# Altium PCB SiC780驱动.PcbDoc
Units mil, origin at the board's own origin, x right, y up, seen from the top; angles counter-clockwise.
Board outline 3535.17 x 1199.11 mil, 2 copper layers (Top Layer, Bottom Layer); 61 components, 32 nets, 295 pads, 272 vias.
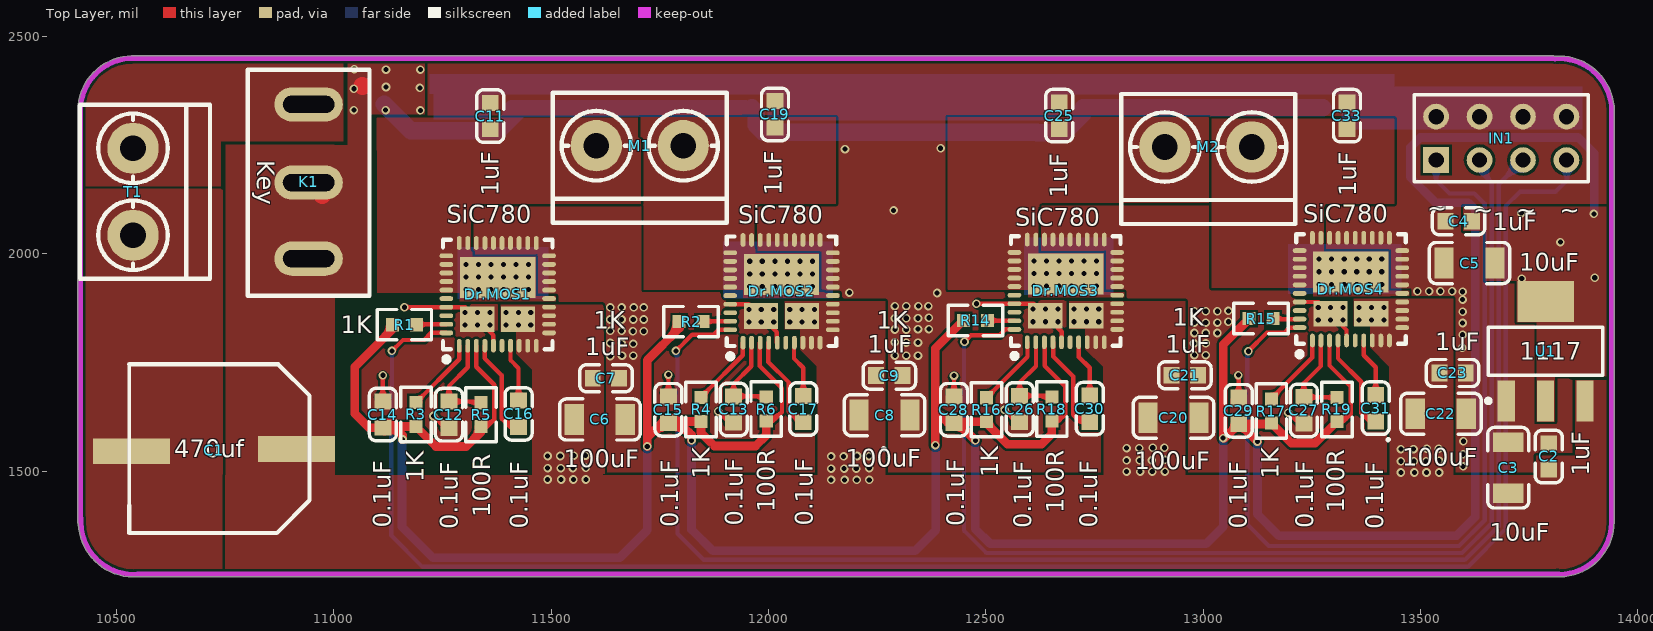
[diagram p0: Top Layer view]
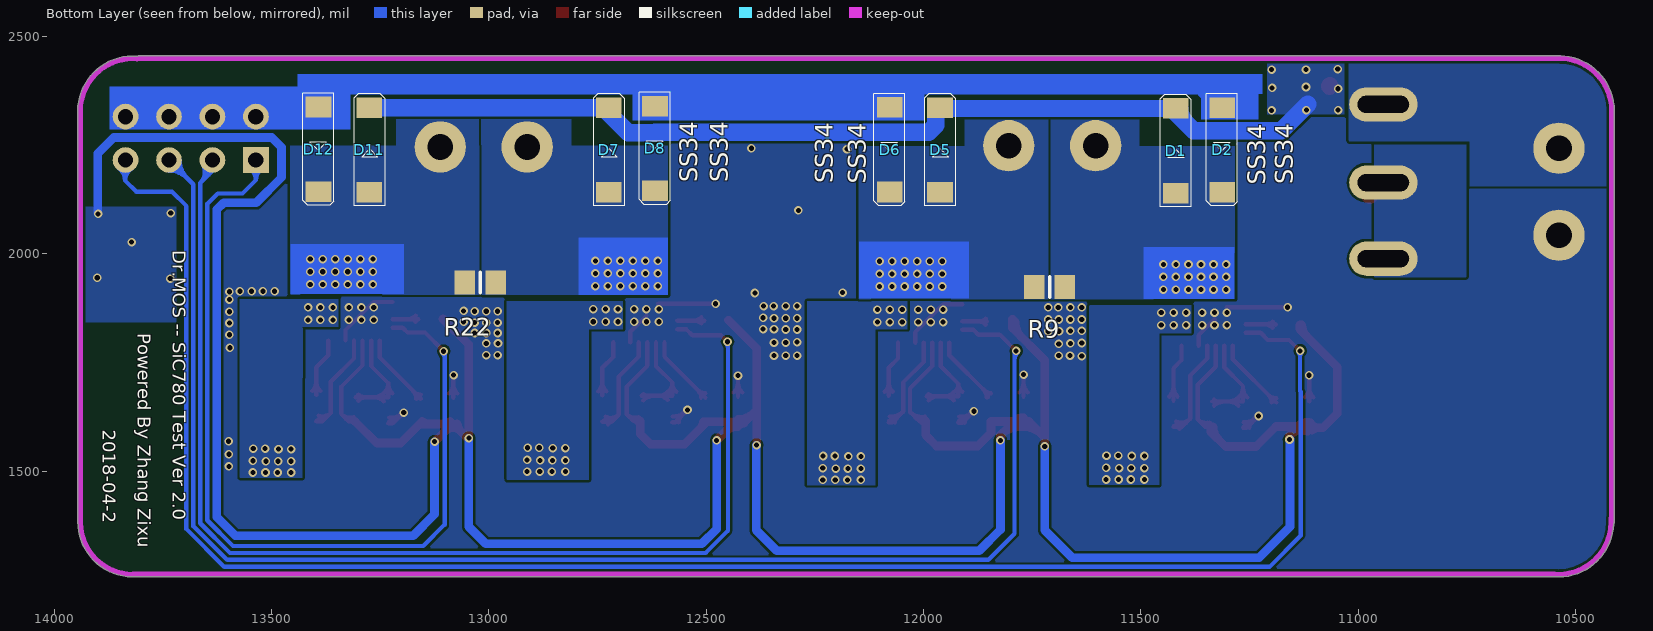
[diagram p1: Bottom Layer view, seen from below]
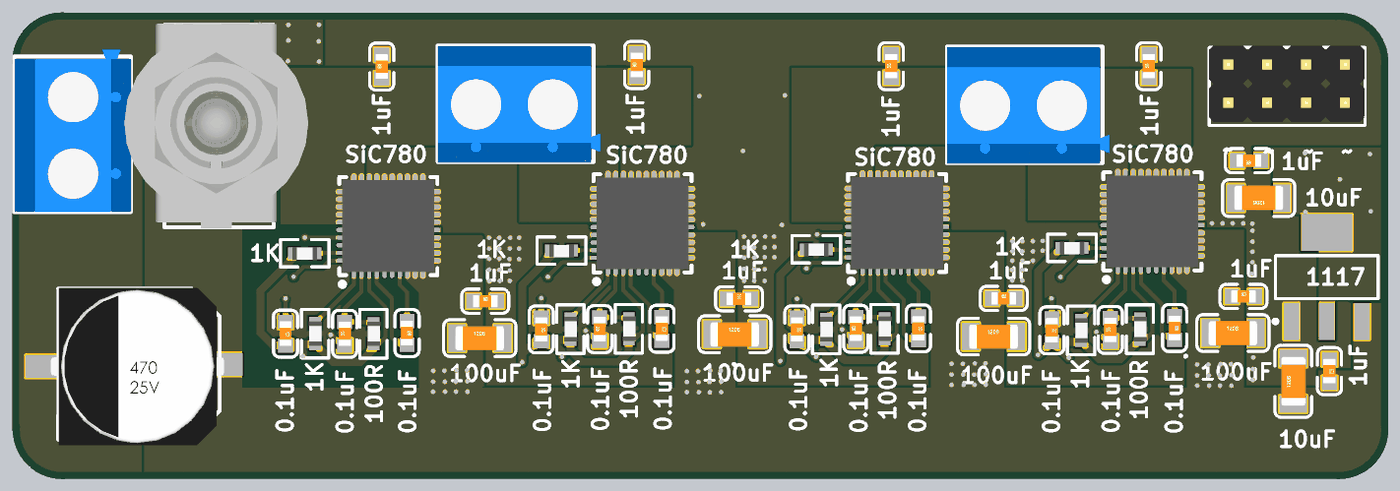
[diagram p2: 3D render of the assembled board from above, using the file's embedded part models]
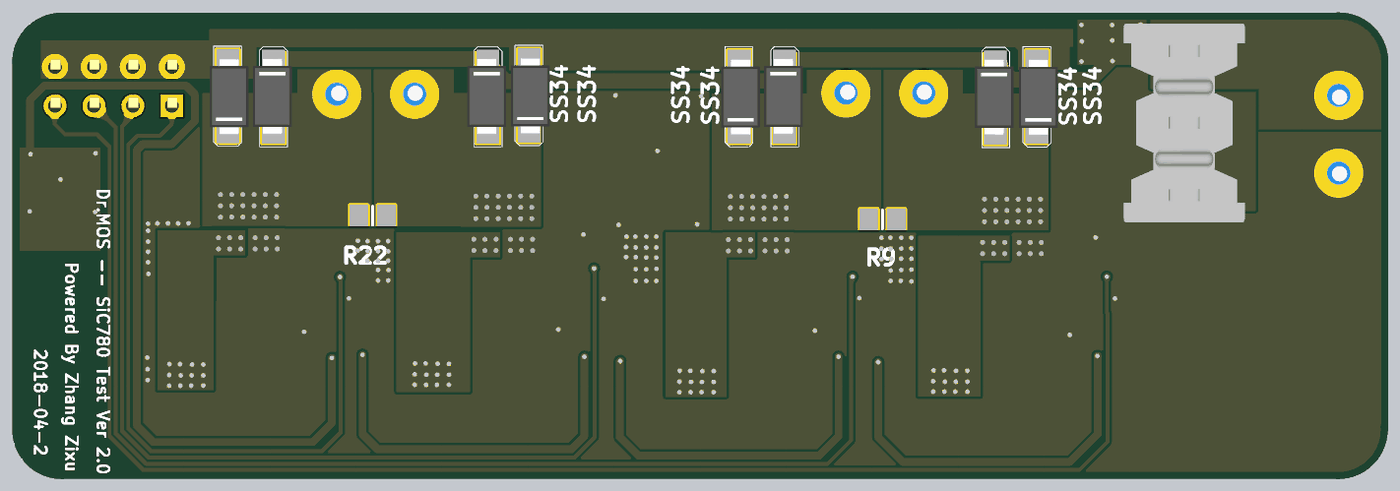
[diagram p3: 3D render of the assembled board from below, using the file's embedded part models]

## Layer stack, top to bottom
Top Solder: solder mask 0.4, Solder Resist, Dk 3.5
Top Layer: signal copper 1.4
Dielectric1: dielectric 12.6, FR-4, Dk 4.8
Bottom Layer: signal copper 1.4
Bottom Solder: solder mask 0.4, Solder Resist, Dk 3.5

## Board outline
10411.08,1382 ccw(c10417,1382) 10412.31,1378.39 ccw(c10539.17,1383.74) 10548,1257.08 13809.79,1257.08 ccw(c13818.82,1383.73) 13945.79,1383.73 ccw(c13818.82,1383.73) 13945.45,1392.92 13945.45,2318.06 ccw(c13939.7,2319.47) 13945.61,2319.03 ccw(c13818.98,2328.29) 13945.95,2328.29 ccw(c13818.98,2328.29) 13809.56,2454.9 ccw(c13810,2449) 13808.45,2454.71 ccw(c13805.3,2449.7) 13805.3,2455.62 10546.75,2455.62 ccw(c10537.71,2328.98) 10411.08,2319.78

## Design rules (kind name [scope] priority, off if disabled: settings)
Clearance [All] p1: gap=6 ignorepadtopadclearanceinfootprint=FALSE except(0: Arc-Hole Track-Hole SMDPad-Hole THPad-Hole Via-Hole Fill-Hole Poly-Hole Region-Hole Text-Hole)
PolygonConnect [All] p1: connectstyle=Direct reliefconductorwidth=10 reliefentries=4 polygonreliefangle="90 Angle" airgapwidth=10
RoutingVias [All] p1: holewidth=28 width=50 viastyle="Through Hole" minholewidth=28 minwidth=50 maxholewidth=28 maxwidth=50
SolderMaskExpansion [All] p1: expansion=4 istentingtop=FALSE
Width [All] p1: maxlimit=100 minlimit=8 preferedwidth=10
30 further rules are at their usual default settings.

## Components (designator, comment, footprint, x,y, rotation, side; value= is the part's Value field where it differs from the comment)
C1 "470uf" CAP 10954,1746 r270 top
C2 "1uF" 0603_C 13795,1534 r270 top
C3 "10uF" 1206_C 13702,1508 r90 top
C4 "1uF" 0603_C 13588,2075 r180 top
C5 "10uF" 1206_C 13613,1979 r180 top
C6 "100uF" 1206_C 11612,1619 r0 top
C7 "1uF" 0603_C 11626,1714 r0 top
C8 "100uF" 1206_C 12267,1629 r0 top
C9 "1uF" 0603_C 12278,1720 r0 top
C11 "1uF" 0603_C 11360,2317 r90 top
C12 "0.1uF" 0603_C 11264.83,1630 r90 top
C13 "0.1uF" 0603_C 11919.83,1642 r90 top
C14 "0.1uF" 0603_C 11112.83,1630.32 r270 top
C15 "0.1uF" 0603_C 11769.83,1641.32 r270 top
C16 "0.1uF" 0603_C 11425,1632 r270 top
C17 "0.1uF" 0603_C 12080,1643 r270 top
C19 "1uF" 0603_C 12015,2321 r90 top
C20 "100uF" 1206_C 12932,1623 r0 top
C21 "1uF" 0603_C 12958,1721 r0 top
C22 "100uF" 1206_C 13547,1632 r0 top
C23 "1uF" 0603_C 13574,1726 r0 top
C25 "1uF" 0603_C 12669,2318 r90 top
C26 "0.1uF" 0603_C 12577.83,1643 r90 top
C27 "0.1uF" 0603_C 13231.83,1640 r90 top
C28 "0.1uF" 0603_C 12426.83,1641.32 r270 top
C29 "0.1uF" 0603_C 13081.83,1639 r270 top
C30 "0.1uF" 0603_C 12739,1644 r270 top
C31 "0.1uF" 0603_C 13397,1645 r270 top
C33 "1uF" 0603_C 13331,2318 r90 top
D1 "SS34" "Diode-1N5189  5*1.5mm" 11420,2140 r90 bottom
D2 "SS34" "Diode-1N5189  5*1.5mm" 11313,2336.58 r270 bottom
D5 "SS34" "Diode-1N5189  5*1.5mm" 11962,2142 r90 bottom
D6 "SS34" "Diode-1N5189  5*1.5mm" 12078,2337 r270 bottom
D7 "SS34" "Diode-1N5189  5*1.5mm" 12724,2142 r90 bottom
D8 "SS34" "Diode-1N5189  5*1.5mm" 12618,2340 r270 bottom
D11 "" "Diode-1N5189  5*1.5mm" 13275,2142 r90 bottom
D12 "" "Diode-1N5189  5*1.5mm" 13392,2338 r270 bottom
Dr.MOS1 "SiC780" SiC780_new 11250,1779 r0 top
Dr.MOS2 "SiC780" SiC780_new 11903,1786 r0 top
Dr.MOS3 "SiC780" SiC780_new 12557,1787 r0 top
Dr.MOS4 "SiC780" SiC780_new 13213,1791 r0 top
IN1 "Header 4X2" HDR2X4_3D 13536,2216 r0 top
K1 "Key" SW-M 10882,2304 r270 top
M1 "" KF301-2P 11694,2199 r270 top
M2 "" KF301-2P 13002,2196 r270 top
R1 "1K" R0603 11162.23,1837 r0 top
R2 "1K" R0603 11822,1844 r0 top
R3 "1K" R0603 11188.83,1630.5 r90 top
R4 "1K" R0603 11844.83,1642 r90 top
R5 "100R" R0603 11338.83,1630 r90 top
R6 "100R" R0603 11994.83,1643 r90 top
R9 "Res Varistor" 6-0805_N 11710,1924 r180 bottom
R14 "1K" R0603 12476.33,1847 r0 top
R15 "1K" R0603 13133.33,1851 r0 top
R16 "1K" R0603 12501.83,1641.5 r90 top
R17 "1K" R0603 13156.83,1638.5 r90 top
R18 "100R" R0603 12651.83,1643 r90 top
R19 "100R" R0603 13307.83,1642 r90 top
R22 "Res Varistor" 6-0805_N 13020,1934 r180 bottom
T1 "" KF301-2P 10588,2133 r0 top
U1 "1117" SOT223_N 13788,1776 r90 top

## Footprints (in the part's own frame and the unit in brackets; to place one, negate y for a bottom-side part, rotate by r counter-clockwise, add the part's x,y. Pads: shape width x height; smd on the part's side, far side on the other; paste and mask are expansions set on the pad)
6-0805_N [mm] "Chip Resistor, Body 2.0x1.2mm, IPC Medium Density"
  rect 1.2x1.4 smd: 1(-0.9,0) 2(0.9,0)
  silkscreen extent 0,-0.6 0,0.6, body extent -1.07,-0.7 1.07,0.7, height 0.7
0603_C [mm]
  rect 0.93x0.98 smd: 1(-0.77,0) 2(0.77,0)
  silkscreen extent -1.53,-0.79 1.54,0.79, body extent -0.8,-0.4 0.8,0.4, height 0.3
1206_C [mm]
  rect 1.13x1.8 smd: 1(-1.49,0) 2(1.49,0)
  silkscreen extent -2.36,-1.2 2.35,1.2, body extent -1.6,-0.81 1.6,0.79, height 1
CAP [mm]
  rect 1.5x4.5 smd: 1(4.953,-1.016) 2(5.08,-10.668)
  silkscreen extent 0,-10.79 9.86,-0.25, body extent -0.07,-11.27 10.23,0.03, height 10.8
"Diode-1N5189  5*1.5mm" [mm]
  rect 1.2x1.5 smd: 1(0,0) 2(4.942,0)
  silkscreen extent -0.8,-0.92 5.75,0.89, body extent 0.04,-1.19 4.97,1.35, height 1.95
HDR2X4_3D [mm] "Connector; Header; 4x2 Position"
  rect 1.5x1.5 hole 0.9: 1(0,0)
  round 1.5 hole 0.9: 2(0,2.54) 3(2.54,0) 4(2.54,2.54) 5(5.08,0) 6(5.08,2.54) 7(7.62,0) 8(7.62,2.54)
  silkscreen extent -1.27,-1.27 8.89,3.81, body extent -1.3,-1.04 8.86,3.94, height 8.84
KF301-2P [mm]
  round 3 hole 1.5: 1(-1.27,-2.286) 2(-1.27,2.794)
  silkscreen extent -4.37,-4.83 3.23,5.33, body extent -4.33,-4.83 3.27,5.78, height 10
R0603 [mil]
  rect 30x30 smd: 1(-27.5,0) 2(27.5,0)
  silkscreen extent -62,-35 62,35, body extent -31,-18 31,16, height 19
SiC780_new [mm]
  oval 0.28x0.8 smd mask+0.051: 1(0.977,0.249) 2(1.477,0.249) 3(1.977,0.249) 4(2.477,0.249) 5(2.977,0.249) 6(3.477,0.249) 7(3.977,0.249) 8(4.477,0.249) 9(4.977,0.249) 10(5.477,0.249) 21(5.477,6.249) 22(4.977,6.249) 23(4.477,6.249) 24(3.977,6.249) 25(3.477,6.249) 26(2.977,6.249) 27(2.477,6.249) 28(1.977,6.249) 29(1.477,6.249) 30(0.977,6.249)
  oval 0.8x0.28 smd mask+0.051: 11(6.227,0.999) 12(6.227,1.499) 13(6.227,1.999) 14(6.227,2.499) 15(6.227,2.999) 16(6.227,3.499) 17(6.227,3.999) 18(6.227,4.499) 19(6.227,4.999) 20(6.227,5.499) 31(0.227,5.499) 32(0.227,4.999) 33(0.227,4.499) 34(0.227,3.999) 35(0.227,3.499) 36(0.227,2.999) 37(0.227,2.499) 38(0.227,1.999) 39(0.227,1.499) 40(0.227,0.999)
  rect 4.4x2.4 smd: 41(3.226,4.242)
  rect 2x1.5 smd: 42(4.42,1.803) 43(2.032,1.803)
  silkscreen extent 0.03,-0.7 6.43,6.45, body extent 0.23,0.25 6.23,6.25, height 0.8
SOT223_N [mm] "SOT223, 4-Leads, Body 6.5x3.5mm, Pitch 2.3mm, Lead Span 7mm, IPC Medium Density"
  rect 2.4x1 smd: 1(-2.9,2.3) 3(-2.9,-2.3) 4(-2.9,0)
  rect 2.4x3.3 smd: 4(2.9,0)
  silkscreen extent -3.02,-3.35 1.4,3.47, body extent -1.85,-3.35 1.85,3.35, height 1.7
SW-M [mm]
  oval 2x4 hole 1 slot 3 at 90 deg: 1(-1.016,1.524) 2(3.556,1.524) 3(8,1.524)
  silkscreen extent -3.05,-2.03 10.16,5.08, body extent -3.15,-4.65 10.25,7.35, height 27.85

## Part data
C1: library part "Cap Pol3", "Polarized Capacitor (Surface Mount)"
C2 C3 C4 C5 C6 C7 C8 C9 C11 C12 C13 C14 C15 C16 C17 C19 C20 C21 C22 C23 C25 C26 C27 C28 C29 C30 C31 C33: library part Cap, "Capacitor"
D1 D2 D5 D6 D7 D8 D11 D12: library part Diode
IN1: "Header, 4-Pin, Dual row"
K1: library part "Header 3", "Header, 3-Pin"
M1 M2 T1: library part "Header 2", "Header, 2-Pin"
R1 R2 R3 R4 R5 R6 R14 R15 R16 R17 R18 R19: library part Res1, "Resistor"
R9 R22: "Varistor (Voltage-Sensitive Resistor)"
U1: library part LM1117DT-3.3, "800mA Low-Dropout Linear Regulator"

## Via types
v1: diameter 19.68, hole 11.81, Top Layer to Bottom Layer, tented both sides, 272 vias

## Nets (pads, with @x,y where several pads share a name; then routed paths per layer and width w, separated by ;. In a path a pad name is that pad's centre, name@x,y a point inside that pad or via, vN(x,y) a via of type N, cw(c..) or ccw(c..) an arc to the next point about the centre after c; other vN are vias at no path point)
BAT: K1.1 T1.2
BOOT_L+: C16.2 Dr.MOS1.4 | length 310.8
  Top Layer w10: Dr.MOS1.4@11347.35,1788.8 11347.35,1759.65 11386,1721 11386,1621 ; 11396.81,1610.19 ccw(c11413.96,1627.35) C16.2@11422.81,1604.76 ; C16.2@11411.44,1597.32 ccw(c11405.32,1595.2) 11405.32,1601.68 ; C16.2@11411.44,1606.05 cw(c11405.32,1608.17) 11405.32,1601.68 ; C16.2@11419.16,1614.07 cw(c11407.87,1642.87) 11386,1621 ; C16.2 11405.32,1601.68 ; 11386,1621 11405.32,1601.68
BOOT_L-: C17.2 Dr.MOS2.4 | length 284.2
  Top Layer w10: Dr.MOS2.4@11999.69,1795.8 11999.69,1751.31 12047,1704 12047,1637 ; C17.2@12061.74,1622.26 cw(c12052.17,1612.68) C17.2@12065.71,1612.68 ; C17.2@12062.02,1621.98 ccw(c12076.74,1636.7) C17.2@12078.7,1615.98 ; C17.2@12077.76,1625.93 cw(c12074.13,1664.13) 12047,1637 ; C17.2 12071.32,1612.68 12047,1637
BOOT_R+: C30.2 Dr.MOS3.4 | length 313.6
  Top Layer w10: Dr.MOS3.4@12655.02,1796.8 12655.02,1763.98 12701,1718 12701,1630 ; 12710.54,1620.46 ccw(c12726.1,1636.02) C30.2@12736.46,1616.6 ; C30.2@12725.91,1608.16 ccw(c12717.32,1604.24) 12717.32,1613.68 ; C30.2@12725.91,1619.21 cw(c12717.32,1623.13) 12717.32,1613.68 ; C30.2@12731.75,1625.43 cw(c12719.46,1648.46) 12701,1630 ; C30.2 12717.32,1613.68 ; 12701,1630 12717.32,1613.68
BOOT_R-: C31.2 Dr.MOS4.4 | length 281.3
  Top Layer w10: Dr.MOS4.4@13310.35,1800.8 13310.35,1759.65 13364,1706 13364,1634 ; 13375.52,1622.48 ccw(c13389.04,1636.01) C31.2@13394.99,1617.83 ; C31.2@13391.88,1627.33 cw(c13383.37,1653.37) 13364,1634 ; C31.2 13383.32,1614.68 13364,1634
CGND_L+: C1.2 C2.1 C3.2 C4.2 C5.2 C6.2 C7.2 C8.2 C9.2 C11.2 C12.1 C13.1 C14.1 C15.1 C19.2 C20.2 C21.2 C22.2 C23.2 C25.2 C26.1 C27.1 C28.1 C29.1 C33.2 D2.1 D6.1 D8.1 D12.1 Dr.MOS1.5 Dr.MOS1.16 Dr.MOS1.17 Dr.MOS1.18 Dr.MOS1.19 Dr.MOS1.20 Dr.MOS1.21 Dr.MOS1.22 Dr.MOS1.23 Dr.MOS1.24 Dr.MOS1.25 Dr.MOS1.26 Dr.MOS1.27 Dr.MOS1.28 Dr.MOS1.37 Dr.MOS1.43 Dr.MOS2.5 Dr.MOS2.16 Dr.MOS2.17 Dr.MOS2.18 Dr.MOS2.19 Dr.MOS2.20 Dr.MOS2.21 Dr.MOS2.22 Dr.MOS2.23 Dr.MOS2.24 Dr.MOS2.25 Dr.MOS2.26 Dr.MOS2.27 Dr.MOS2.28 Dr.MOS2.37 Dr.MOS2.43 Dr.MOS3.5 Dr.MOS3.16 Dr.MOS3.17 Dr.MOS3.18 Dr.MOS3.19 Dr.MOS3.20 Dr.MOS3.21 Dr.MOS3.22 Dr.MOS3.23 Dr.MOS3.24 Dr.MOS3.25 Dr.MOS3.26 Dr.MOS3.27 Dr.MOS3.28 Dr.MOS3.37 Dr.MOS3.43 Dr.MOS4.5 Dr.MOS4.16 Dr.MOS4.17 Dr.MOS4.18 Dr.MOS4.19 Dr.MOS4.20 Dr.MOS4.21 Dr.MOS4.22 Dr.MOS4.23 Dr.MOS4.24 Dr.MOS4.25 Dr.MOS4.26 Dr.MOS4.27 Dr.MOS4.28 Dr.MOS4.37 Dr.MOS4.43 IN1.2 IN1.4 IN1.6 IN1.8 T1.1 U1.1 | length 5062.7
  Top Layer w10: C14.1@11103.42,1670.04 ccw(c11080.71,1692.76) 11112.83,1692.76 ccw(c11144.96,1692.76) C14.1@11122.24,1670.04 ; v1@11109.41,1717.41 cw(c11101.14,1709.14) 11112.83,1709.14 cw(c11124.52,1709.14) v1@11116.26,1717.41 ; C14.1 v1(11112.83,1720.83) ; v1@11162,1877 v1(11162.39,1877.39) 11258.77,1877.39 Dr.MOS1.43@11302.45,1877.39 ; v1@11165.81,1873.96 cw(c11174.08,1865.7) 11174.08,1877.39 cw(c11174.08,1889.08) v1@11165.81,1880.81 ; v1@11229,1622.16 cw(c11229,1610.47) 11237.27,1618.73 cw(c11245.53,1627) v1@11233.84,1627 ; v1@11230.25,1622.32 cw(c11233.28,1611.03) 11239.12,1621.15 ; v1@11233.68,1628.25 ccw(c11244.97,1631.28) 11239.13,1621.15 ; C12.1@11245.68,1610.32 ccw(c11263.38,1628.02) C12.1@11263.79,1602.99 ; C12.1@11246.46,1609.54 cw(c11236.61,1599.69) C12.1@11250.54,1599.69 ; C12.1@11263.63,1612.99 cw(c11262.84,1660.83) v1(11229,1627) 11256.31,1599.69 C12.1 ; Dr.MOS1.43@11329.83,1850 11367.04,1812.8 Dr.MOS1.5@11367.04,1788.8 ; C15.1@11760.42,1681.04 ccw(c11737.71,1703.76) 11769.83,1703.76 ccw(c11801.96,1703.76) C15.1@11779.24,1681.04 ; v1@11766.41,1718.74 cw(c11758.14,1710.48) 11769.83,1710.48 cw(c11781.52,1710.48) v1@11773.26,1718.74 ; C15.1 v1(11769.83,1722.17) ; v1@11884,1633.16 cw(c11884,1621.47) 11892.27,1629.73 cw(c11900.53,1638) v1@11888.84,1638 ; v1@11885.25,1633.32 cw(c11888.28,1622.03) 11894.12,1632.15 ; v1@11888.68,1639.25 ccw(c11899.97,1642.28) 11894.13,1632.15 ; 11899.81,1622.19 ccw(c11917.29,1639.66) C13.1@11918.67,1614.99 ; C13.1@11902.17,1619.83 cw(c11894.02,1611.69) C13.1@11905.54,1611.69 ; Dr.MOS2.37@11911.1,1884.39 11954.78,1884.39 11982.17,1857 12019.37,1819.8 Dr.MOS2.5@12019.37,1795.8 ; C13.1@11918.11,1624.97 cw(c11915.62,1669.62) v1(11884,1638) 11910.31,1611.69 C13.1 ; C28.1@12417.42,1681.04 ccw(c12394.71,1703.76) 12426.83,1703.76 ccw(c12458.96,1703.76) C28.1@12436.24,1681.04 ; v1@12423.41,1716.41 cw(c12415.14,1708.14) 12426.83,1708.14 cw(c12438.52,1708.14) v1@12430.26,1716.41 ; C28.1 v1(12426.83,1719.83) ; v1(12478.39,1885.39) 12566.44,1885.39 Dr.MOS3.43@12610.11,1885.39 ; v1@12481.81,1881.96 cw(c12490.08,1873.7) 12490.08,1885.39 cw(c12490.08,1897.08) v1@12481.81,1888.81 ; v1@12543,1636.16 cw(c12543,1624.47) 12551.27,1632.73 cw(c12559.53,1641) v1@12547.84,1641 ; v1(12543,1641) 12571.31,1612.69 C26.1 ; v1@12544.25,1636.32 cw(c12546.73,1627.06) 12551.53,1635.36 ; v1@12544.68,1639.32 ccw(c12576.85,1671.48) C26.1@12576.85,1625.99 ; v1@12547.68,1642.25 ccw(c12561,1645.82) 12554.11,1633.88 ; 12558.05,1625.95 cw(c12544.78,1612.69) C26.1@12563.54,1612.69 ; Dr.MOS3.43@12637.5,1858 12674.7,1820.8 Dr.MOS3.5@12674.7,1796.8 ; C29.1@13072.42,1678.72 ccw(c13049.71,1701.44) 13081.83,1701.44 ccw(c13113.96,1701.44) C29.1@13091.24,1678.72 ; v1@13077.58,1717.58 cw(c13067.3,1707.3) 13081.83,1707.3 ; C29.1 v1@13081.83,1720.17 ; v1@13196,1630.16 cw(c13196,1618.47) 13204.27,1626.73 cw(c13212.53,1635) v1@13200.84,1635 ; v1@13197.25,1630.32 cw(c13200.28,1619.03) 13206.12,1629.15 ; v1@13200.68,1636.25 ccw(c13211.97,1639.28) 13206.13,1629.15 ; 13211,1620 ccw(c13228.21,1637.2) C27.1@13230.53,1612.98 ; Dr.MOS4.37@13221.77,1889.39 13265.45,1889.39 13292.83,1862 13330.04,1824.8 Dr.MOS4.5@13330.04,1800.8 ; C27.1@13229.58,1622.93 cw(c13225.59,1664.59) v1(13196,1635) 13221.31,1609.69 C27.1
  Bottom Layer w30: 11352,2376.65 11357,2381.65 12033.35,2381.65 ; 12053.2,2361.8 cw(c12028.4,2337) D6.1@12063.47,2337 ; D6.1 12033.35,2381.65 ; 12593.2,2364.8 cw(c12568.4,2340) D8.1@12603.47,2340 ; D8.1 12576.35,2381.65 ; 13367.2,2362.8 cw(c13342.4,2338) D12.1@13377.47,2338 ; IN1.2@13531.33,2329.76 cw(c13520.29,2362.29) 13496,2338 ; IN1.2@13546.27,2305.73 cw(c13571.07,2280.93) 13571.07,2316 cw(c13571.07,2351.07) IN1.2@13546.27,2326.27 ; IN1.4@13618,2316 IN1.2@13518,2316 ; IN1.4@13625.73,2305.73 ccw(c13600.93,2280.93) 13600.93,2316 ccw(c13600.93,2351.07) IN1.4@13625.73,2326.27 ; IN1.4@13646.27,2305.73 cw(c13671.07,2280.93) 13671.07,2316 cw(c13671.07,2351.07) IN1.4@13646.27,2326.27 ; IN1.6@13725.73,2305.73 ccw(c13700.93,2280.93) 13700.93,2316 ccw(c13700.93,2351.07) IN1.6@13725.73,2326.27 ; IN1.6@13746.27,2305.73 cw(c13771.07,2280.93) 13771.07,2316 cw(c13771.07,2351.07) IN1.6@13746.27,2326.27 ; IN1.8@13818,2316 IN1.2@13518,2316 ; IN1.8@13825.73,2305.73 ccw(c13800.93,2280.93) 13800.93,2316 ccw(c13800.93,2351.07) IN1.8@13825.73,2326.27 ; 12033.35,2381.65 12576.35,2381.65 ; 12576.35,2381.65 13348.35,2381.65 D12.1 13496,2338 ; 13496,2338 IN1.2@13518,2316
  Bottom Layer w40: D2.1 11313,2337.65 11352,2376.65
  other v1: 13598,1511 13598,1539 13599,1569 13081,1721 11636,1765 11663,1766 11689,1766 12291,1766 12317,1766 12344,1766 12980,1767 13006,1767 13596,1784 11689,1793 11662,1794 12979,1794 13006,1794 11636,1795 12317,1796 12344,1796 12291,1797 13597,1814 12980,1818 13006,1818 13033,1818 11688,1822 11713,1822 11636,1823 11662,1823 12291,1826 12317,1826 12344,1827 12369,1827 11302,1836 11330.5,1836 11359,1836 13597,1841 12980,1842 13006,1842 13033,1842 11955,1843 11983.5,1843 12012,1843 12609,1844 12637.5,1844 12666,1844 13058,1844 13265,1848 13293.5,1848 13322,1848 11636,1849 11662,1849 11689,1849 11713,1849 12291,1852 12317,1852 12344,1852 12369,1853 11302,1865 11330.5,1865 11359,1865 13597,1867 12980,1868 13006,1868 13033,1868 13058,1869 11955,1872 11983.5,1872 12012,1872 12609,1873 12637.5,1873 12666,1873 11636,1877 11662,1877 11690,1877 11713,1877 13265,1877 13293.5,1877 13322,1877 12291,1880 12317,1880 12345,1880 12368,1880 13597,1895 12388,1910 12186,1911 13597,1913 13493,1914 13520,1914 13546,1914 13573,1914 12288,2100 12176,2241 12396,2243
NetC12_2: C12.2 Dr.MOS1.2 R5.2 | length 356.4
  Top Layer w10: C12.2@11255.42,1669.72 ccw(c11232.71,1692.44) 11264.83,1692.44 ccw(c11296.96,1692.44) C12.2@11274.24,1669.72 ; C12.2@11275.23,1650.91 cw(c11297.94,1628.19) 11297.94,1660.32 cw(c11297.94,1692.44) C12.2@11275.23,1669.72 ; 11307.9,1660.32 cw(c11307.9,1626.56) R5.2@11331.76,1650.43 ; Dr.MOS1.2@11307.98,1788.8 11307.98,1738.98 11264.83,1695.83 C12.2 R5.2@11336.02,1660.32 ; 11321.49,1660.32 ccw(c11321.49,1674.85) R5.2@11331.76,1664.57
NetC13_2: C13.2 Dr.MOS2.2 R6.2 | length 343.6
  Top Layer w10: C13.2@11911.29,1682.51 ccw(c11895.93,1700.83) 11919.83,1700.83 ; C13.2@11928.38,1682.51 cw(c11943.74,1700.83) 11919.83,1700.83 ; C13.2@11930.23,1662.91 cw(c11952.94,1640.19) 11952.94,1672.32 cw(c11952.94,1704.44) C13.2@11930.23,1681.72 ; Dr.MOS2.2@11960.32,1795.8 11960.32,1741.32 11919.83,1700.83 ; 11966.31,1672.32 cw(c11966.31,1641.98) R6.2@11987.76,1663.43 ; 11975.07,1672.32 ccw(c11975.07,1690.26) R6.2@11987.76,1677.57 ; R6.2@11993.02,1672.32 C13.2 11919.83,1700.83
NetC16_1: C16.1 Dr.MOS1.7 | length 184.7
  Top Layer w10: Dr.MOS1.7@11406.41,1788.8 11406.41,1755.59 11425,1737 C16.1 ; C16.1@11415.59,1671.72 ccw(c11392.87,1694.44) 11425,1694.44 ccw(c11457.13,1694.44) C16.1@11434.41,1671.72
NetC17_1: C17.1 Dr.MOS2.7 | length 181.8
  Top Layer w10: Dr.MOS2.7@12058.74,1795.8 12058.74,1759.26 12080,1738 C17.1 ; C17.1@12070.59,1682.72 ccw(c12047.87,1705.44) 12080,1705.44 ccw(c12112.13,1705.44) C17.1@12089.41,1682.72
NetC26_2: C26.2 Dr.MOS3.2 R18.2 | length 345.3
  Top Layer w10: C26.2@12568.78,1683.07 ccw(c12549.5,1703.83) 12577.83,1703.83 ; C26.2@12586.89,1683.07 cw(c12606.17,1703.83) 12577.83,1703.83 ; C26.2@12588.23,1663.91 cw(c12610.94,1641.19) 12610.94,1673.32 cw(c12610.94,1705.44) C26.2@12588.23,1682.72 ; Dr.MOS3.2@12615.65,1796.8 12615.65,1741.65 12577.83,1703.83 ; 12620.9,1673.32 cw(c12620.9,1639.56) R18.2@12644.76,1663.43 ; 12634.49,1673.32 ccw(c12634.49,1687.85) R18.2@12644.76,1677.57 ; R18.2@12649.02,1673.32 C26.2 12577.83,1703.83
NetC27_2: C27.2 Dr.MOS4.2 R19.2 | length 360.7
  Top Layer w10: C27.2@13222.42,1679.72 ccw(c13199.71,1702.44) 13231.83,1702.44 ccw(c13263.96,1702.44) C27.2@13241.24,1679.72 ; C27.2@13242.23,1660.91 cw(c13264.94,1638.19) 13264.94,1670.32 cw(c13264.94,1702.44) C27.2@13242.23,1679.72 ; Dr.MOS4.2@13270.98,1800.8 13270.98,1741.98 13231.83,1702.83 C27.2 R19.2@13307.02,1670.32 ; 13281.72,1670.32 cw(c13281.72,1643.39) R19.2@13300.76,1662.43 ; 13285.66,1670.32 ccw(c13285.66,1691.67) R19.2@13300.76,1676.57
NetC30_1: C30.1 Dr.MOS3.7 | length 183.3
  Top Layer w10: Dr.MOS3.7@12714.07,1796.8 12714.07,1762.93 12739,1738 C30.1 ; C30.1@12729.59,1683.72 ccw(c12706.87,1706.44) 12739,1706.44 ccw(c12771.13,1706.44) C30.1@12748.41,1683.72
NetC31_1: C31.1 Dr.MOS4.7 | length 187.4
  Top Layer w10: Dr.MOS4.7@13369.41,1800.8 13369.41,1766.59 13397,1739 C31.1 ; C31.1@13387.59,1684.72 ccw(c13364.87,1707.44) 13397,1707.44 ccw(c13429.13,1707.44) C31.1@13406.41,1684.72
NetDr.MOS1_1: Dr.MOS1.1 R3.2 | length 209.9
  Top Layer w10: R3.2 11288.3,1757.46 Dr.MOS1.1@11288.3,1788.8 ; R3.2@11188.83,1668 ccw(c11188.83,1692.14) 11205.9,1675.07 ccw(c11222.98,1658) R3.2@11198.83,1658
NetDr.MOS1_39: Dr.MOS1.39 R1.2 | length 107.4
  Top Layer w10: R1.2 11190.75,1838.02 Dr.MOS1.39@11258.77,1838.02 ; R1.2@11196.8,1829.93 cw(c11216.33,1810.41) 11216.33,1838.02 ; R1.2@11196.8,1844.07 ccw(c11211.42,1858.69) 11211.42,1838.02
NetDr.MOS2_1: Dr.MOS2.1 R4.2 | length 200.7
  Top Layer w10: R4.2@11844.83,1679.5 ccw(c11844.83,1700.42) 11859.63,1685.63 ; R4.2@11852.5,1669.5 11852.5,1678.5 11940.63,1766.63 Dr.MOS2.1@11940.63,1795.8 ; R4.2@11854.83,1669.5 cw(c11882.19,1669.5) 11862.85,1688.85
NetDr.MOS2_39: Dr.MOS2.39 R2.2 | length 94.7
  Top Layer w10: R2.2@11854.32,1845.02 Dr.MOS2.39@11911.1,1845.02 ; R2.2@11856.57,1836.93 cw(c11876.09,1817.41) 11876.09,1845.02 ; R2.2@11856.57,1851.07 ccw(c11871.19,1865.69) 11871.19,1845.02
NetDr.MOS3_1: Dr.MOS3.1 R16.2 | length 204.7
  Top Layer w10: R16.2 12595.96,1763.13 Dr.MOS3.1@12595.96,1796.8 ; R16.2@12501.83,1679 ccw(c12501.83,1703.14) 12518.9,1686.07 ccw(c12535.98,1669) R16.2@12511.83,1669
NetDr.MOS3_39: Dr.MOS3.39 R14.2 | length 99.5
  Top Layer w10: R14.2@12504.82,1846.02 Dr.MOS3.39@12566.44,1846.02 ; R14.2@12510.9,1839.93 cw(c12525.6,1825.23) 12525.6,1846.02 ; R14.2@12510.9,1854.07 ccw(c12530.35,1873.52) 12530.35,1846.02
NetDr.MOS4_1: Dr.MOS4.1 R17.2 | length 211.9
  Top Layer w10: R17.2 13156.83,1667.24 13251.3,1761.7 Dr.MOS4.1@13251.3,1800.8 ; R17.2@13156.83,1676 ccw(c13156.83,1697.15) 13171.79,1682.2 ; R17.2@13166.83,1666 cw(c13193.96,1666) 13174.78,1685.18
NetDr.MOS4_39: Dr.MOS4.39 R15.2 | length 97.9
  Top Layer w10: R15.2@13161.82,1850.02 Dr.MOS4.39@13221.77,1850.02 ; R15.2@13167.9,1843.93 cw(c13182.6,1829.23) 13182.6,1850.02 ; R15.2@13167.9,1858.07 ccw(c13187.35,1877.52) 13187.35,1850.02
PWM_L+: Dr.MOS1.40 IN1.7 | length 4253.3
  Top Layer w10: v1(11133.68,1776.68) 11159,1802 11208,1802 11224.33,1818.33 Dr.MOS1.40@11258.77,1818.33 ; v1@11133.68,1781.52 ccw(c11133.68,1793.21) 11141.94,1784.94 ccw(c11150.21,1776.68) v1@11138.52,1776.68
  Bottom Layer w10: v1@11130.25,1773.25 cw(c11121.99,1764.99) 11133.68,1764.99 cw(c11145.37,1764.99) v1@11137.1,1773.25 ; v1(11133.68,1776.68) 11133.68,1684.68 11132,1683 11132,1352 11204.09,1279.91 13608.79,1279.91 13696,1367.12 13696,2110 13729,2143 13811,2143 13837,2169 ; IN1.7@13822.64,2195.43 cw(c13805.48,2168.99) 13837,2168.99 ; IN1.7 13837,2215 13837,2169 ; IN1.7@13850.7,2196.37 ccw(c13871.2,2168.99) 13837,2168.99
PWM_L-: Dr.MOS2.40 IN1.5 | length 3563.7
  Top Layer w10: v1(11787,1776.68) 11824.32,1814 11874,1814 11885.33,1825.33 Dr.MOS2.40@11911.1,1825.33 ; v1@11787,1781.52 ccw(c11787,1793.21) 11795.27,1784.94 ccw(c11803.53,1776.68) v1@11791.84,1776.68
  Bottom Layer w10: v1@11783.58,1773.25 cw(c11766.43,1756.11) 11790.68,1756.11 ; v1(11787,1776.68) 11790.68,1773 11790.68,1356.32 11851.09,1295.91 13602.16,1295.91 13680,1373.75 13680,2160 IN1.5 ; IN1.5@13711.47,2216 cw(c13652.26,2216) 13694.13,2174.13 cw(c13736,2132.26) IN1.5@13736,2191.47 ; IN1.5@13721.47,2216 cw(c13686.4,2216) 13711.2,2191.2 cw(c13736,2166.4) IN1.5@13736,2201.47
PWM_R+: Dr.MOS3.40 IN1.3 | length 2822.4
  Top Layer w10: v1(12451,1798) 12466,1813 12532,1813 12545.33,1826.33 Dr.MOS3.40@12566.44,1826.33 ; v1@12451,1802.84 ccw(c12451,1814.53) 12459.27,1806.27 ccw(c12467.53,1798) v1@12455.84,1798
  Bottom Layer w10: 12450,1783.89 cw(c12465.1,1783.89) v1@12454.42,1794.58 ; v1(12451,1798) 12450,1797 12450,1363.3 12501.4,1311.91 13595.53,1311.91 13664,1380.37 13664,2163 ; IN1.3 13636,2191 13664,2163 ; IN1.3@13640.01,2213.89 ccw(c13663.91,2201.3) 13644.81,2182.19 ; IN1.3@13648.85,2209.23 ccw(c13676.49,2194.68) 13654.4,2172.6 ; IN1.3@13657.7,2204.57 ccw(c13689.06,2188.06) 13664,2163
PWM_R-: Dr.MOS4.40 IN1.1 | length 2133.6
  Top Layer w10: v1(13104,1776) 13147,1819 13187,1819 13198.33,1830.33 Dr.MOS4.40@13221.77,1830.33 ; v1@13104,1780.84 ccw(c13104,1792.53) 13112.27,1784.27 ccw(c13120.53,1776) v1@13108.84,1776
  Bottom Layer w10: 13101.84,1759.1 cw(c13120.9,1759.1) v1@13107.42,1772.58 ; v1(13104,1776) 13101.84,1773.84 13101.84,1377.16 13151.09,1327.91 13588.91,1327.91 13648,1387 13648,2115 13624,2139 13567,2139 13536,2170 ; IN1.1@13522.33,2195.63 cw(c13505.13,2170) 13536,2170 ; IN1.1 13536,2170 ; IN1.1@13549.67,2195.63 ccw(c13566.87,2170) 13536,2170
VCC+5V: C4.1 C5.1 C14.2 C15.2 C28.2 C29.2 Dr.MOS1.3 Dr.MOS2.3 Dr.MOS3.3 Dr.MOS4.3 R1.1 R2.1 R3.1 R4.1 R5.1 R6.1 R14.1 R15.1 R16.1 R17.1 R18.1 R19.1 U1.4 | length 9874.6
  Top Layer w10: Dr.MOS1.3@11327.67,1788.8 11327.67,1740.33 11369,1699 11369,1619 ; R5.1@11341.69,1612.08 ccw(c11349.54,1638.46) 11369,1619 ; 11357.13,1607.13 cw(c11344.1,1620.17) R5.1 11352.5,1602.5 11369,1619 ; Dr.MOS2.3@11980,1795.8 11980,1742 12031,1691 12031,1636 ; R6.1@11996.65,1625.33 ccw(c12003.69,1663.31) 12031,1636 ; R6.1@12003.9,1611.29 cw(c12010.5,1608.23) 12010.5,1615.5 ; R6.1@12003.9,1619.71 ccw(c12010.5,1622.77) 12010.5,1615.5 ; 12017.56,1622.56 cw(c11999.49,1640.63) R6.1 12010.5,1615.5 ; Dr.MOS3.3@12635.33,1796.8 12635.33,1742.67 12683,1695 12683,1631 ; R18.1@12655.28,1624.89 ccw(c12664.35,1649.64) 12683,1631 ; R18.1@12660.9,1611.29 cw(c12667.5,1608.23) 12667.5,1615.5 ; R18.1@12660.9,1619.71 ccw(c12667.5,1622.77) 12667.5,1615.5 ; 12671.93,1619.93 cw(c12658.41,1633.44) R18.1 12667.5,1615.5 ; Dr.MOS4.3@13290.67,1800.8 13290.67,1743.33 13340,1694 13340,1632 ; R19.1@13310.46,1624.15 ccw(c13318.46,1653.53) 13340,1632 ; 13327.81,1619.81 cw(c13313.25,1634.37) R19.1 13322.5,1614.5 13340,1632 ; 12010.5,1615.5 12031,1636 ; 12667.5,1615.5 12683,1631
  Top Layer w20: C14.2@11105.98,1594.13 ccw(c11091.79,1579.95) 11091.79,1600 ccw(c11091.79,1620.06) C14.2@11105.98,1605.87 ; C14.2@11109.83,1610.99 cw(c11118.27,1587.72) 11135.77,1605.23 ; C14.2@11116.65,1592.19 cw(c11130.1,1555.11) 11158,1583 ; 11118.93,1810.93 ccw(c11092.87,1837) R1.1@11129.73,1837 ; C14.2@11119.69,1594.13 cw(c11141.12,1572.7) 11141.12,1603 ; R1.1 11134.73,1826.73 11048,1740 11048,1633 11081,1600 C14.2 11115.83,1603 11138,1603 ; 11151.2,1589.8 cw(c11134.4,1573) v1@11158.16,1573 ; v1(11158,1573) 11158,1583 ; 11322.05,1574.05 ccw(c11293.6,1602.5) R5.1@11333.83,1602.5 ; R5.1 11338.83,1590.83 11305,1557 11234.83,1557 R3.1 11138,1603 ; v1(11721,1557) 11721,1578 ; 11729.32,1586.32 cw(c11768.85,1546.79) C15.2@11768.85,1602.69 ; C15.2@11769.83,1614.5 11757.5,1614.5 11721,1578 ; C15.2@11769.97,1622.66 cw(c11772.02,1594.39) 11792.07,1614.43 ; C15.2@11771.42,1602.71 cw(c11776.2,1536.7) 11823,1583.5 ; 11775,1809 ccw(c11740.01,1844) R2.1@11789.5,1844 ; C15.2@11776.69,1605.13 cw(c11799.32,1582.5) 11799.32,1614.5 ; C15.2@11777.88,1606.63 cw(c11792,1597.9) 11792,1614.5 ; R2.1@11795.33,1849 11795.33,1829.33 11721,1755 11721,1578 ; 11814.43,1592.07 cw(c11793.36,1571) v1@11823.16,1571 ; v1(11823,1571) 11823,1583.5 ; R6.1 11994.83,1582.83 11970,1558 11875,1558 11844.83,1588.17 R4.1 11792,1614.5 ; v1(12384,1560) 12384,1640 ; 12389.73,1634.27 ccw(c12425.85,1670.38) C28.2@12425.85,1619.31 ; C28.2@12416,1614 R16.1 12501.83,1610.17 12550,1562 12628,1562 12651.83,1585.83 R18.1 ; C28.2@12417,1609 12438,1609 v1(12476,1571) ; C28.2 12413,1611 12384,1640 ; C28.2@12427.82,1602.69 cw(c12427.82,1562.88) 12455.97,1591.03 ; C28.2@12433.69,1605.13 cw(c12455.12,1583.7) 12455.12,1614 ; R14.1 12384,1782.17 12384,1640 ; R16.1@12506.83,1614 ccw(c12528.16,1614) 12513.08,1598.92 ; v1(13046,1576) 13049.15,1576 C29.2 C29.2@13084.31,1608.69 ; v1@13046.54,1576.54 13046.54,1791.71 R15.1 ; C29.2@13065.97,1592.82 ccw(c13050.11,1608.69) C29.2@13072.54,1608.69 ; C29.2@13068.35,1595.2 cw(c13080.85,1582.7) C29.2@13080.85,1600.38 ; C29.2@13082.82,1600.38 cw(c13082.82,1576.71) C29.2@13099.55,1593.45 ; C29.2@13088.69,1602.81 cw(c13102.87,1588.63) 13102.87,1608.69 cw(c13102.87,1628.74) C29.2@13088.69,1614.56 ; v1(13125,1568) C29.2@13084.31,1608.69 ; 13139.17,1608.69 ccw(c13139.17,1628.66) R17.1@13153.3,1614.54 ; R17.1@13154.52,1608.69 C29.2@13084.31,1608.69 ; R17.1 13202.83,1565 13258.33,1565 R19.1 ; 11138,1603 ccw(c11138,1579.8) 11120.19,1594.67 cw(c11138,1579.8) 11138,1603 ; 11138,1603 11158,1583 ; 11792,1614.5 11823,1583.5
  Bottom Layer w20: v1@11157,1573 11157,1372 11228.09,1300.91 11657.91,1300.91 11721,1364 v1(11721,1557) ; v1(11823,1571) 11823,1366 11872.09,1316.91 12337.91,1316.91 12385,1364 12385,1559 v1(12384,1560) ; v1(12476,1571) 12476,1367 12510.09,1332.91 13006.91,1332.91 13046,1372 v1(13046,1576) ; v1(13125,1568) 13125,1401 13174.15,1351.85 13583.15,1351.85 13626,1394.7 13626,2102 13610,2118 13535,2118 13477,2176 13477,2245.68 13499.32,2268 ; 13503,2268 13863,2268 13900,2231 v1@13900,2094
  other v1: 13733,1943 13901,1945 13822,2027 13899,2092 13732,2094
VIN_L+: C1.1 C2.2 C3.1 C6.1 C7.1 C8.1 C9.1 C20.1 C21.1 C22.1 C23.1 D1.2 D5.2 D7.2 D11.2 Dr.MOS1.8 Dr.MOS1.9 Dr.MOS1.10 Dr.MOS1.11 Dr.MOS1.12 Dr.MOS1.13 Dr.MOS1.14 Dr.MOS1.42 Dr.MOS2.8 Dr.MOS2.9 Dr.MOS2.10 Dr.MOS2.11 Dr.MOS2.12 Dr.MOS2.13 Dr.MOS2.14 Dr.MOS2.42 Dr.MOS3.8 Dr.MOS3.9 Dr.MOS3.10 Dr.MOS3.11 Dr.MOS3.12 Dr.MOS3.13 Dr.MOS3.14 Dr.MOS3.42 Dr.MOS4.8 Dr.MOS4.9 Dr.MOS4.10 Dr.MOS4.11 Dr.MOS4.12 Dr.MOS4.13 Dr.MOS4.14 Dr.MOS4.42 K1.2 K1.3 U1.3 | length 2336.2
  Top Layer w40: K1.2@10973,2135 K1.2@10973,2166 ; 11065,2387 11066,2386
  Bottom Layer w40: 11116,2344 11177,2283 11378,2283 11420,2325 D1.2 D5.2@11945.42,2334.58 ; 11396.96,2301.96 ccw(c11364.34,2334.58) D1.2@11410.47,2334.58 ; D5.2 11972,2326.58 11972,2296.19 11988.19,2280 12617,2280 12618,2279 12679,2279 12724,2324 D7.2 D11.2
  other v1: 12144,1480 12175,1480 12203,1480 12232,1480 11492,1481 11523,1481 11551,1481 11580,1481 13455,1497 13486,1497 13514,1497 13543,1497 12824,1499 12855,1499 12883,1499 12912,1499 12144,1506 12174,1506 12202,1506 11492,1507 11522,1507 11550,1507 12232,1507 11580,1508 13455,1523 13485,1523 13513,1523 13543,1524 12824,1525 12854,1525 12882,1525 12912,1526 12144,1534 12173,1534 11492,1535 11521,1535 12204,1535 12231,1535 11552,1536 11579,1536 13455,1551 13484,1551 13515,1552 13542,1552 12824,1553 12853,1553 12884,1554 12911,1554 11396,1836 11424.5,1836 11453,1836 12049,1843 12077.5,1843 12106,1843 12703,1844 12731.5,1844 12760,1844 13359,1848 13387.5,1848 13416,1848 11396,1865 11424.5,1865 11453,1865 12049,1872 12077.5,1872 12106,1872 12703,1873 12731.5,1873 12760,1873 13359,1877 13387.5,1877 13416,1877 11199,2330 11046,2331 11119,2331 11046,2380 11198,2382 11120,2384 11120,2424 11199,2424 11047,2425
VSWH_L+: C11.1 D1.1 D2.2 Dr.MOS1.15 Dr.MOS1.29 Dr.MOS1.30 Dr.MOS1.31 Dr.MOS1.32 Dr.MOS1.33 Dr.MOS1.34 Dr.MOS1.35 Dr.MOS1.41 M1.1 R9.2
  other v1: 11304,1918 11332.8,1918 11361.6,1918 11390.4,1918 11419.2,1918 11448,1918 11304,1947 11332.8,1947 11361.6,1947 11390.4,1947 11419.2,1947 11448,1947 11304,1976 11332.8,1976 11361.6,1976 11390.4,1976 11419.2,1976 11448,1976
VSWH_L-: C19.1 D5.1 D6.2 Dr.MOS2.15 Dr.MOS2.29 Dr.MOS2.30 Dr.MOS2.31 Dr.MOS2.32 Dr.MOS2.33 Dr.MOS2.34 Dr.MOS2.35 Dr.MOS2.41 M1.2 R9.1
  other v1: 11957,1925 11985.8,1925 12014.6,1925 12043.4,1925 12072.2,1925 12101,1925 11957,1954 11985.8,1954 12014.6,1954 12043.4,1954 12072.2,1954 12101,1954 11957,1983 11985.8,1983 12014.6,1983 12043.4,1983 12072.2,1983 12101,1983
VSWH_R+: C25.1 D7.1 D8.2 Dr.MOS3.15 Dr.MOS3.29 Dr.MOS3.30 Dr.MOS3.31 Dr.MOS3.32 Dr.MOS3.33 Dr.MOS3.34 Dr.MOS3.35 Dr.MOS3.41 M2.1 R22.2
  other v1: 12611,1926 12639.8,1926 12668.6,1926 12697.4,1926 12726.2,1926 12755,1926 12611,1955 12639.8,1955 12668.6,1955 12697.4,1955 12726.2,1955 12755,1955 12611,1984 12639.8,1984 12668.6,1984 12697.4,1984 12726.2,1984 12755,1984
VSWH_R-: C33.1 D11.1 D12.2 Dr.MOS4.15 Dr.MOS4.29 Dr.MOS4.30 Dr.MOS4.31 Dr.MOS4.32 Dr.MOS4.33 Dr.MOS4.34 Dr.MOS4.35 Dr.MOS4.41 M2.2 R22.1
  other v1: 13267,1930 13295.8,1930 13324.6,1930 13353.4,1930 13382.2,1930 13411,1930 13267,1959 13295.8,1959 13324.6,1959 13353.4,1959 13382.2,1959 13411,1959 13267,1988 13295.8,1988 13324.6,1988 13353.4,1988 13382.2,1988 13411,1988
pads on no net: Dr.MOS1.6 Dr.MOS1.36 Dr.MOS1.38 Dr.MOS2.6 Dr.MOS2.36 Dr.MOS2.38 Dr.MOS3.6 Dr.MOS3.36 Dr.MOS3.38 Dr.MOS4.6 Dr.MOS4.36 Dr.MOS4.38

## Polygon pours and split planes (outlines as drawn)
VIN_L+ on Top Layer "Top Layer-No Net" (solid, remove dead copper, pour order 77): 10751,1991 10751,1464 10752,1463 11005,1463 11002,1466 11002,2139 11002,2250 11001,2251 10751,2251
VIN_L+ on Top Layer "Top Layer-No Net" (solid, remove dead copper, pour order 74): 10751,2251 10751,1946 10963,1946 10963,2251
BAT on Top Layer "Top Layer-No Net" (solid, remove dead copper, pour order 59): 10418,2156 10740,2156 10740,2258 10741,2259 11022,2259 11022,2449.7 11019.7,2452 10417,2452
CGND_L+ on Top Layer "Top Layer-No Net" (solid, remove dead copper, pour order 78): 13012,1943 13012,1576 13012,1543 12969,1543 12969,1942 12968,1943
CGND_L+ on Top Layer "Top Layer-No Net" (solid, remove dead copper, pour order 76): 12368,1940 12368,1545 12281,1545 12281,1937 12278,1940
CGND_L+ on Top Layer "Top Layer-No Net" (solid, remove dead copper, pour order 75): 11707,1924 11707,1640 11706,1639 11706,1543 11626,1543 11627,1544 11627,1923
VSWH_R- on Top Layer "Top Layer-No Net" (solid, remove dead copper, pour order 73): 13474,1903 13253,1903 13253,1922 13070,1922 13020,1922 13020,2311 13440,2311 13440,2109 13277,2109 13277,2005 13426,2005 13426,1915 13474,1915
VSWH_R+ on Top Layer "Top Layer-No Net" (solid, remove dead copper, pour order 71): 12818,1900 12598,1900 12598,1918 12549,1918 12414,1918 12413,1919 12413,2314 13012,2314 13013,2313 13013,2178 13013,2110.59 13011.41,2109 12621,2109 12621,2001 12771,2001 12771,1912 12818,1912
VSWH_L+ on Top Layer "Top Layer-No Net" (solid, remove dead copper, pour order 68): 11099,2239 11707,2239 11707,2312 11706,2313 11236,2313 11100,2313 11099,2314
VSWH_L- on Top Layer "Top Layer-No Net" (solid, remove dead copper, pour order 67): 12163,1899 11942,1899 11942,1917 11942,1918 11791,1918 11759,1918 11760,1918 11704,1918 11706,1920 11706,2262.57 11706,2314 12257,2314 12156,2314 12155,2313 12155,2110 11971,2110 11970,2111 11969,2110 11969,2001 12116,2001 12116,1912 12163,1912
VSWH_L+ on Top Layer "Top Layer-No Net" (solid, remove dead copper, pour order 49): 11511,1891 11290,1891 11290,1911 11099,1911 11100,1912 11100,2263.57 11707,2263.57 11706,2262.57 11706,2109 11322,2109 11319,2109 11319,1993 11464,1993 11464,1903 11511,1903
CGND_L+ on Top Layer "Top Layer-No Net" (solid, remove dead copper, pour order 65): 13285,2021 13285,2109 13580,2109 13580,1934 13580,1922 13442,1922 13442,2021
CGND_L+ on Top Layer "Top Layer-No Net" (solid, remove dead copper, pour order 64): 12629,2017 12629,2112 12630,2111 13013,2111 13013,1920 13012,1919 12787,1919 12787,2017
CGND_L+ on Top Layer "Top Layer-No Net" (solid, remove dead copper, pour order 61): 11974,2016 11974,2109 12368,2109 12368,1916 12132,1916 12131,1917 12131,2016
CGND_L+ on Top Layer "Top Layer-No Net" (solid, remove dead copper, pour order 50): 11322,2009 11322,2109 11707,2109 11707,1911 11706,1910 11479,1910 11479,2009
CGND_L+ on Top Layer "Top Layer-No Net" (solid, remove dead copper, pour order 51): 11261,2333 11261,2410 13430,2410 13431,2411 13431,2330
VIN_L+ on Top Layer "Top Layer-No Net" (solid, remove dead copper, pour order 60): 13766,1536 13856,1536 13856,1708 13855,1709 13934,1709 13935,1708 13935,1347 13935,1359 13935,1357 13934,1358 13766,1358
VCC+5V on Top Layer "Top Layer-No Net" (solid, remove dead copper, pour order 81): 13768,1614 13768,1720 13768,1843 13722,1843 13722,1938 13650,1938 13650,2053 13599,2053 13599,2109 13931,2109 13931,1719 13810,1719 13809,1720 13809,1614
CGND_L+ on Top Layer "Top Layer-No Net" (solid, remove dead copper, pour order 82): 13814,1546 13582,1546 13582,1920 13580,1922 13559,1922 13559,2042 13641,2042 13640,2041 13640,1866 13713,1866 13713,1831 13759,1831 13757,1829 13757,1605 13813,1605 13814,1604
VIN_L+ on Top Layer "Top Layer-No Net" (solid, remove dead copper, pour order 52): 10750,1491 10750,1262 10757,1255 13950,1255 13950,1491
VIN_L+ on Top Layer "Top Layer-No Net" (solid, remove dead copper, pour order 53): 11384,1821 11420,1821 11420,1770 11456,1734 11456,1599 11456,1494 11623,1494 11623,1887 11623,1880 11623,1884 11622,1883 11384,1883
VIN_L+ on Top Layer "Top Layer-No Net" (solid, remove dead copper, pour order 54): 12037,1887 12037,1827 12073,1827 12073,1780 12111,1742 12111,1670 12113,1668 12113,1489 12269,1489 12269,1571 12269,1891 12037,1891
VIN_L+ on Top Layer "Top Layer-No Net" (solid, remove dead copper, pour order 55): 12692,1891 12692,1828 12729,1828 12729,1781 12770,1740 12770,1660 12771,1659 12771,1486 12959,1486 12959,1748 12959,1891
VIN_L+ on Top Layer "Top Layer-No Net" (solid, remove dead copper, pour order 56): 11457,1520 11457,1464 11619,1464 11619,1520
VIN_L+ on Top Layer "Top Layer-No Net" (solid, remove dead copper, pour order 57): 13347,1897 13347,1834.56 13384,1834.56 13384,1785.21 13428,1740.9 13428,1677.45 13429,1676.44 13429,1472 13575,1472 13575,1897
VIN_L+ on Top Layer "Top Layer-No Net" (solid, pour order 70): 11032,2438 11032,2321 11209,2321 11209,2438
VIN_L+ on Top Layer "Top Layer-No Net" (solid, remove dead copper, pour order 90): 10751,2250 10751,1902 10752,1901 11083,1901 11084,1902 11084,2251
VIN_L+ on Top Layer "Top Layer-No Net" (solid, remove dead copper, pour order 91): 11032,2345 11032,2231 11033,2230 11083,2230 11083,2345
CGND_L+ on Top Layer "Top Layer-No Net" (solid, remove dead copper, pour order 92): 10410,2462 10410,1255 13949,1255 13950,1256 13950,2460
VIN_L+ on Bottom Layer "Top Layer-No Net" (solid, remove dead copper, pour order 69): 10750,2251 10751,2250 10751,1947 10752,1946 10962,1946 10963,1947 10963,2251
BAT on Bottom Layer "Top Layer-No Net" (solid, remove dead copper, pour order 62): 10429,2156 10743,2156 10743,2259 11020,2259 11022,2261 11022,2449.7 11021.7,2450 10429,2450
VSWH_L+ on Bottom Layer "Top Layer-No Net" (solid, remove dead copper, pour order 84): 11284,2166 11284,2248 11707,2248 11707,1902 11707,1896 11284,1896
VSWH_L- on Bottom Layer "Top Layer-No Net" (solid, remove dead copper, pour order 85): 11707,2248 11707,1896 12148,1896 12149,1897 12149,2248
VSWH_R+ on Bottom Layer "Top Layer-No Net" (solid, remove dead copper, pour order 87): 12588,2169 12588,2249 13016,2249 13016,1905 13015,1906 12628,1906 12588,1906
VSWH_R- on Bottom Layer "Top Layer-No Net" (solid, remove dead copper, pour order 88): 13016,2249 13016,1906.41 13457.41,1906.41 13458,1907 13457,1908 13457,2249
VCC+5V on Bottom Layer "Top Layer-No Net" (solid, remove dead copper, pour order 89): 13719,2109 13719,1842 13720,1843 13929,1843 13929,2109
VIN_L+ on Bottom Layer "Top Layer-No Net" (solid, remove dead copper, pour order 48): 11384,1882 11384,1818 11460,1818 11458,1816 11458,1469 11619,1469 11619,1598 11619,1880 11617,1882
VIN_L+ on Bottom Layer "Top Layer-No Net" (solid, remove dead copper, pour order 58): 12037,1891 12037,1827 12112,1827 12111,1826 12111,1684 12111,1468 12267,1468 12269,1468 12268,1469 12268,1562 12268,1891
VIN_L+ on Bottom Layer "Top Layer-No Net" (solid, remove dead copper, pour order 63): 12692,1891 12692,1828 12692,1827 12771,1827 12770,1826 12770,1728 12770,1480 12961,1480 12959,1482 12959,1672 12959,1891
VIN_L+ on Bottom Layer "Top Layer-No Net" (solid, remove dead copper, pour order 66): 13347,1896 13347,1832 13431,1832 13428,1829 13428,1715 13429,1714 13429,1509 13429,1485 13574,1485 13573,1486 13573,1896
VIN_L+ on Bottom Layer "Top Layer-No Net" (solid, remove dead copper, pour order 72): 11032,2438 11032,2321 11209,2321 11209,2438
VSWH_L+ on Bottom Layer "Top Layer-No Net" (solid, remove dead copper, pour order 79): 11707,2166 11504,2166 11504,2315 11707,2315
VSWH_L- on Bottom Layer "Top Layer-No Net" (solid, remove dead copper, pour order 80): 11707,2166 11707,2308.36 11904.64,2308.36 11905,2308 11905,2166
VSWH_R+ on Bottom Layer "Top Layer-No Net" (solid, remove dead copper, pour order 83): 12811,2313 12811,2122 13017,2122 13017,2313
VSWH_R- on Bottom Layer "Top Layer-No Net" (solid, remove dead copper, pour order 86): 13016,2122 13213,2122 13213,2316 13206,2323 13017,2323
CGND_L+ on Bottom Layer "Top Layer-No Net" (solid, remove dead copper, pour order 93): 10410,2461 10410,1256 13949,1256 13949,2461

## Keep-outs
Keep-Out Layer:
  lines w11.81: 10417,1382 10417,2320 cw(c10537.71,2328.98) 10546.53,2449.7 13805.3,2449.7 ; 10418.44,1392.56 ccw(c10539.17,1383.74) 10548.14,1263.03 ; 10548,1263 13819,1263 ; 13810,1263 ccw(c13818.82,1383.73) 13939.53,1392.7 13939.53,2319.3 ; 13810,2449 cw(c13818.98,2328.29) 13939.7,2319.47

## Other copper
Bottom Layer:
  rectangle net CGND_L+: 13318,2286 13873,2385
  rectangle net CGND_L+: 11998,2306.96 12669.87,2378
  rectangle net CGND_L+: 11229,2309 11362,2409
  rectangle net CGND_L+: 11220,2368 13440,2414
  rectangle net VSWH_L+: 11284,1896 11494,2016
  rectangle net VSWH_L-: 11895,1897 12149,2029
  rectangle net VSWH_R+: 12588,1905 12794,2038
  rectangle net VSWH_R-: 13195,1908 13457,2023

## Silkscreen, mask and mechanical layers (free items; w line width, h text height)
Top Overlay:
  lines w11.81: 12265,1552 12266,1551 12267,1550 ; 13425,1572 13426,1573
Bottom Overlay:
  text "Dr.MOS -- SiC780 Test Ver 2.0" at 13727,2008 h30 r90
  text "Powered By Zhang Zixu" at 13808,1818 h30 r90
  text "2018-04-2" at 13888,1595 h30 r90

## Text inside footprints (layer, text, board x,y; h text height)
IN1: Top Overlay "~" at 13621,2081 h40; Top Overlay "~" at 13516,2086 h40; Top Overlay "~" at 13821,2081 h40; Top Overlay "~" at 13721,2081 h40